# EAGLE board CT_schematic (EAGLE 7.6.0)

Size 100 x 80 mm. Coordinates in mm from the lower left corner, seen from the top.
Outline: 0,0 100,0 100,80 0,80 0,0
Copper layers (1*16): Top 0.035mm / dielectric 1.5mm / Bottom 0.035mm
Design rules "default": minimum track width 10mil, minimum drill 24mil, track to track 8mil, track to pad 8mil, pad to pad 8mil, via to via 8mil, smd to smd 8mil, copper to edge 40mil, drill to drill 8mil, minimum pad ring 10mil, minimum via ring 8mil, stop-mask expansion 4mil, vias tented up to drill 0mil, thermal gap 10mil

## Footprints (pad centres in the part's own frame; a part is rotated, then mirrored left to right if it is on the bottom)
C0603 = smd 0.8 x 0.8: 1 -0.762,0; 2 0.762,0
C0402 = smd 0.5 x 0.5: 1 -0.508,0; 2 0.508,0
C1210 = smd 1.2 x 2.5: 1 -1.524,0; 2 1.524,0
EXV-9H = smd 3.505 x 1.676: 1 -2.857,0; 2 2.857,0
L0603 = smd 0.8 x 0.8: 1 -0.762,0; 2 0.762,0
PJ-037B_PACKAGE = drill 3.7 square: 1 12,0 | drill 3.2 square: 2 6,0
R0603 = smd 0.8 x 0.8: 1 -0.762,0; 2 0.762,0
UFQFPN28 = smd 0.559 x 0.305: 1 -2.07,1.5; 7 -2.07,-1.5; 15 2.07,-1.5; 21 2.07,1.5 | smd 0.813 x 0.305: 2 -1.943,1; 3 -1.943,0.5; 4 -1.943,0; 5 -1.943,-0.5; 6 -1.943,-1; 16 1.943,-1; 17 1.943,-0.5; 18 1.943,0; 19 1.943,0.5; 20 1.943,1 | smd 0.305 x 0.559: 8 -1.5,-2.07; 14 1.5,-2.07; 22 1.5,2.07; 28 -1.5,2.07 | smd 0.305 x 0.813: 9 -1,-1.943; 10 -0.5,-1.943; 11 0,-1.943; 12 0.5,-1.943; 13 1,-1.943; 23 1,1.943; 24 0.5,1.943; 25 0,1.943; 26 -0.5,1.943; 27 -1,1.943
ASEK = smd 1.4 x 1: 1 -1.1,-0.8; 2 1.1,-0.8; 3 1.1,0.8; 4 -1.1,0.8
ASFL1 = smd 1.7 x 1.5: 1 -1.27,-1.1; 2 1.27,-1.1; 3 1.27,1.1; 4 -1.27,1.1
WSON-8 = smd 0.3 x 0.6: 1 -0.75,0; 2 0.05,0; 3 0.85,0; 4 1.65,0; 5 1.65,3.8; 6 0.85,3.8; 7 0.05,3.8; 8 -0.75,3.8 | smd 3 x 2.6: PAD 0.45,1.9
SON-6 = smd 0.55 x 0.3: 1 -0.355,0.5 | smd 0.52 x 0.3: 2 -0.37,0; 3 -0.37,-0.5; 4 0.37,-0.5; 5 0.37,0; 6 0.37,0.5
SW_4-1437565-2 = smd 1.4 x 2.1: 1 -2.23,4.55; 2 -2.23,-4.55; 3 2.23,4.55; 4 2.23,-4.55
LGM67K-G1J2-24-Z = smd 0.8 x 1.4: A -2,0; C 0,0
NC7SZ125M5X = smd 1.3 x 0.7: 1 -1.3,0.95; 2 -1.3,0; 3 -1.3,-0.95; 4 1.3,-0.95; 5 1.3,0.95
DUMMY_PACKAGE_78 = drill 0.3: 1 0,-1; 2 1.5,-1; 3 3,-1

## Placement (x,y rotation side)
C1  1e-07  [C0603]  -22.86,46.99 0 top  (outside the outline)
C2  1e-07  [C0603]  -26.67,46.99 0 top  (outside the outline)
C3  1e-07  [C0603]  -30.48,46.99 0 top  (outside the outline)
C4  1e-07  [C0603]  -34.29,46.99 0 top  (outside the outline)
C5  4.7e-06  [C0603]  -19.05,46.99 0 top  (outside the outline)
C6  1e-08  [C0603]  -38.1,46.99 0 top  (outside the outline)
C7  1e-06  [C0603]  -41.91,46.99 0 top  (outside the outline)
C8  1e-08  [C0402]  -26.67,52.07 0 top  (outside the outline)
C9  1e-08  [C0402]  -30.48,52.07 0 top  (outside the outline)
C10  1e-06  [C0603]  -45.72,46.99 0 top  (outside the outline)
C11  1e-05  [C1210]  -29.21,35.56 0 top  (outside the outline)
C12  1e-07  [C0402]  -34.29,52.07 0 top  (outside the outline)
C13  0.0001  [EXV-9H]  -38.1,27.94 0 top  (outside the outline)
C14  0.0001  [EXV-9H]  -49.53,27.94 0 top  (outside the outline)
C15  1e-08  [C0402]  -38.1,52.07 0 top  (outside the outline)
F1  240.0  [L0603]  -49.53,46.99 0 top  (outside the outline)
J1  PJ-037B  [PJ-037B_PACKAGE]  -27.94,7.62 0 top  (outside the outline)
R1  10000.0  [R0603]  -41.91,41.91 0 top  (outside the outline)
R2  1000.0  [R0603]  -53.34,46.99 0 top  (outside the outline)
R3  1600.5  [R0603]  -15.24,52.07 0 top  (outside the outline)
R4  4700.0  [R0603]  -19.05,52.07 0 top  (outside the outline)
R5  10000.0  [R0603]  -46.99,41.91 0 top  (outside the outline)
R6  100000.0  [R0603]  -21.59,41.91 0 top  (outside the outline)
R7  153694.38  [R0603]  -16.51,41.91 0 top  (outside the outline)
R8  100000.0  [R0603]  -26.67,41.91 0 top  (outside the outline)
R9  10000.0  [R0603]  -52.07,41.91 0 top  (outside the outline)
R10  10000.0  [R0603]  -15.24,46.99 0 top  (outside the outline)
R11  9100.0  [R0603]  -22.86,52.07 0 top  (outside the outline)
R12  680000.0  [R0603]  -31.75,41.91 0 top  (outside the outline)
R13  120000.0  [R0603]  -36.83,41.91 0 top  (outside the outline)
U1  STM32L031G6U7  [UFQFPN28]  -44.45,35.56 0 top  (outside the outline)
U2  ASEK-32.768KHz-ECST  [ASEK]  -29.21,27.94 0 top  (outside the outline)
U3  ASFL1-12MHZ-NCS  [ASFL1]  -45.72,19.05 0 top  (outside the outline)
U4  LP2951ACSDX/NOPB  [WSON-8]  -29.21,17.78 0 top  (outside the outline)
U5  TPS3895ADRYR  [SON-6]  -46.99,50.8 0 top  (outside the outline)
U6  4-1437565-2  [SW_4-1437565-2]  -44.45,6.35 0 top  (outside the outline)
U7  Q65110A2395  [LGM67K-G1J2-24-Z]  -17.78,35.56 0 top  (outside the outline)
U8  nc7sz125m5x  [NC7SZ125M5X]  -50.8,34.29 0 top  (outside the outline)
U9  Dummy  [DUMMY_PACKAGE_78]  -44.45,52.07 0 top  (outside the outline)

## Library data of the parts
C1-C15 F1 J1 R1-R13 U1-U9 = circuit_tree

## Nets
CLK_U1_2: U1.2 U2.3
CLK_U1_6: U1.6 U3.3
GND: C1.2 C2.2 C3.2 C4.2 C5.2 C6.2 C7.2 C8.2 C9.2 C10.2 C11.2 C12.2 C13.2 C14.2 C15.2 J1.2 R2.2 R5.2 R8.2 R11.2 R13.2 U1.16 U1.28 U2.2 U3.2 U4.3 U4.4 U4.PAD U5.2 U7.C U8.1 U8.3 U9.1
NET_U1_4: R4.1 U1.4 U8.4
NET_U1_5: C6.1 C7.1 F1.1 U1.5
NET_U1_25: R3.1 U1.25 U7.A
NET_U1_26: R1.1 U1.26 U6.3 U6.4
NET_U1_27: R5.1 U1.27
NET_U4_5: R6.1 U4.5
NET_U4_7: R7.2 R8.1 U4.7
NET_U5_1: R10.1 R11.1 U5.1
NET_U5_3: R12.2 R13.1 U5.3
NET_U5_4: R9.1 U5.4 U8.2
NET_U6_1: R2.1 U6.1 U6.2
PROC_ADC_IN4: U1.10 U9.2
PROC_ADC_IN6: U1.12 U9.3
VCC_S1_6V7: C10.1 C13.1 C14.1 J1.1 U4.8
VCC_TIER1_3V3: C1.1 C2.1 C3.1 C4.1 C5.1 C8.1 C9.1 C11.1 C12.1 C15.1 F1.2 R1.2 R3.2 R4.2 R6.2 R7.1 R9.2 R10.2 R12.1 U1.1 U1.17 U2.4 U3.4 U4.1 U5.6 U8.5

## Tracks (layer width: path | path; a pad name or v marks a point on that pad's centre or on a via)
CLK_U1_2  (1 unrouted)
CLK_U1_6  (1 unrouted)
GND  (32 unrouted)
NET_U1_4  (2 unrouted)
NET_U1_5  (3 unrouted)
NET_U1_25  (2 unrouted)
NET_U1_26  (3 unrouted)
NET_U1_27  (1 unrouted)
NET_U4_5  (1 unrouted)
NET_U4_7  (2 unrouted)
NET_U5_1  (2 unrouted)
NET_U5_3  (2 unrouted)
NET_U5_4  (2 unrouted)
NET_U6_1  (2 unrouted)
PROC_ADC_IN4  (1 unrouted)
PROC_ADC_IN6  (1 unrouted)
VCC_S1_6V7  (4 unrouted)
VCC_TIER1_3V3  (25 unrouted)